# Altium PCB M3 ICE.PcbDoc (part 2 of 2)
Units mil, origin at the board's own origin, x right, y up, seen from the top; angles counter-clockwise.
Board outline 4160 x 4350 mil, 4 copper layers (Top Layer, Mid-Layer 1, Mid-Layer 2, Bottom Layer); 242 components, 240 nets, 954 pads, 145 vias.
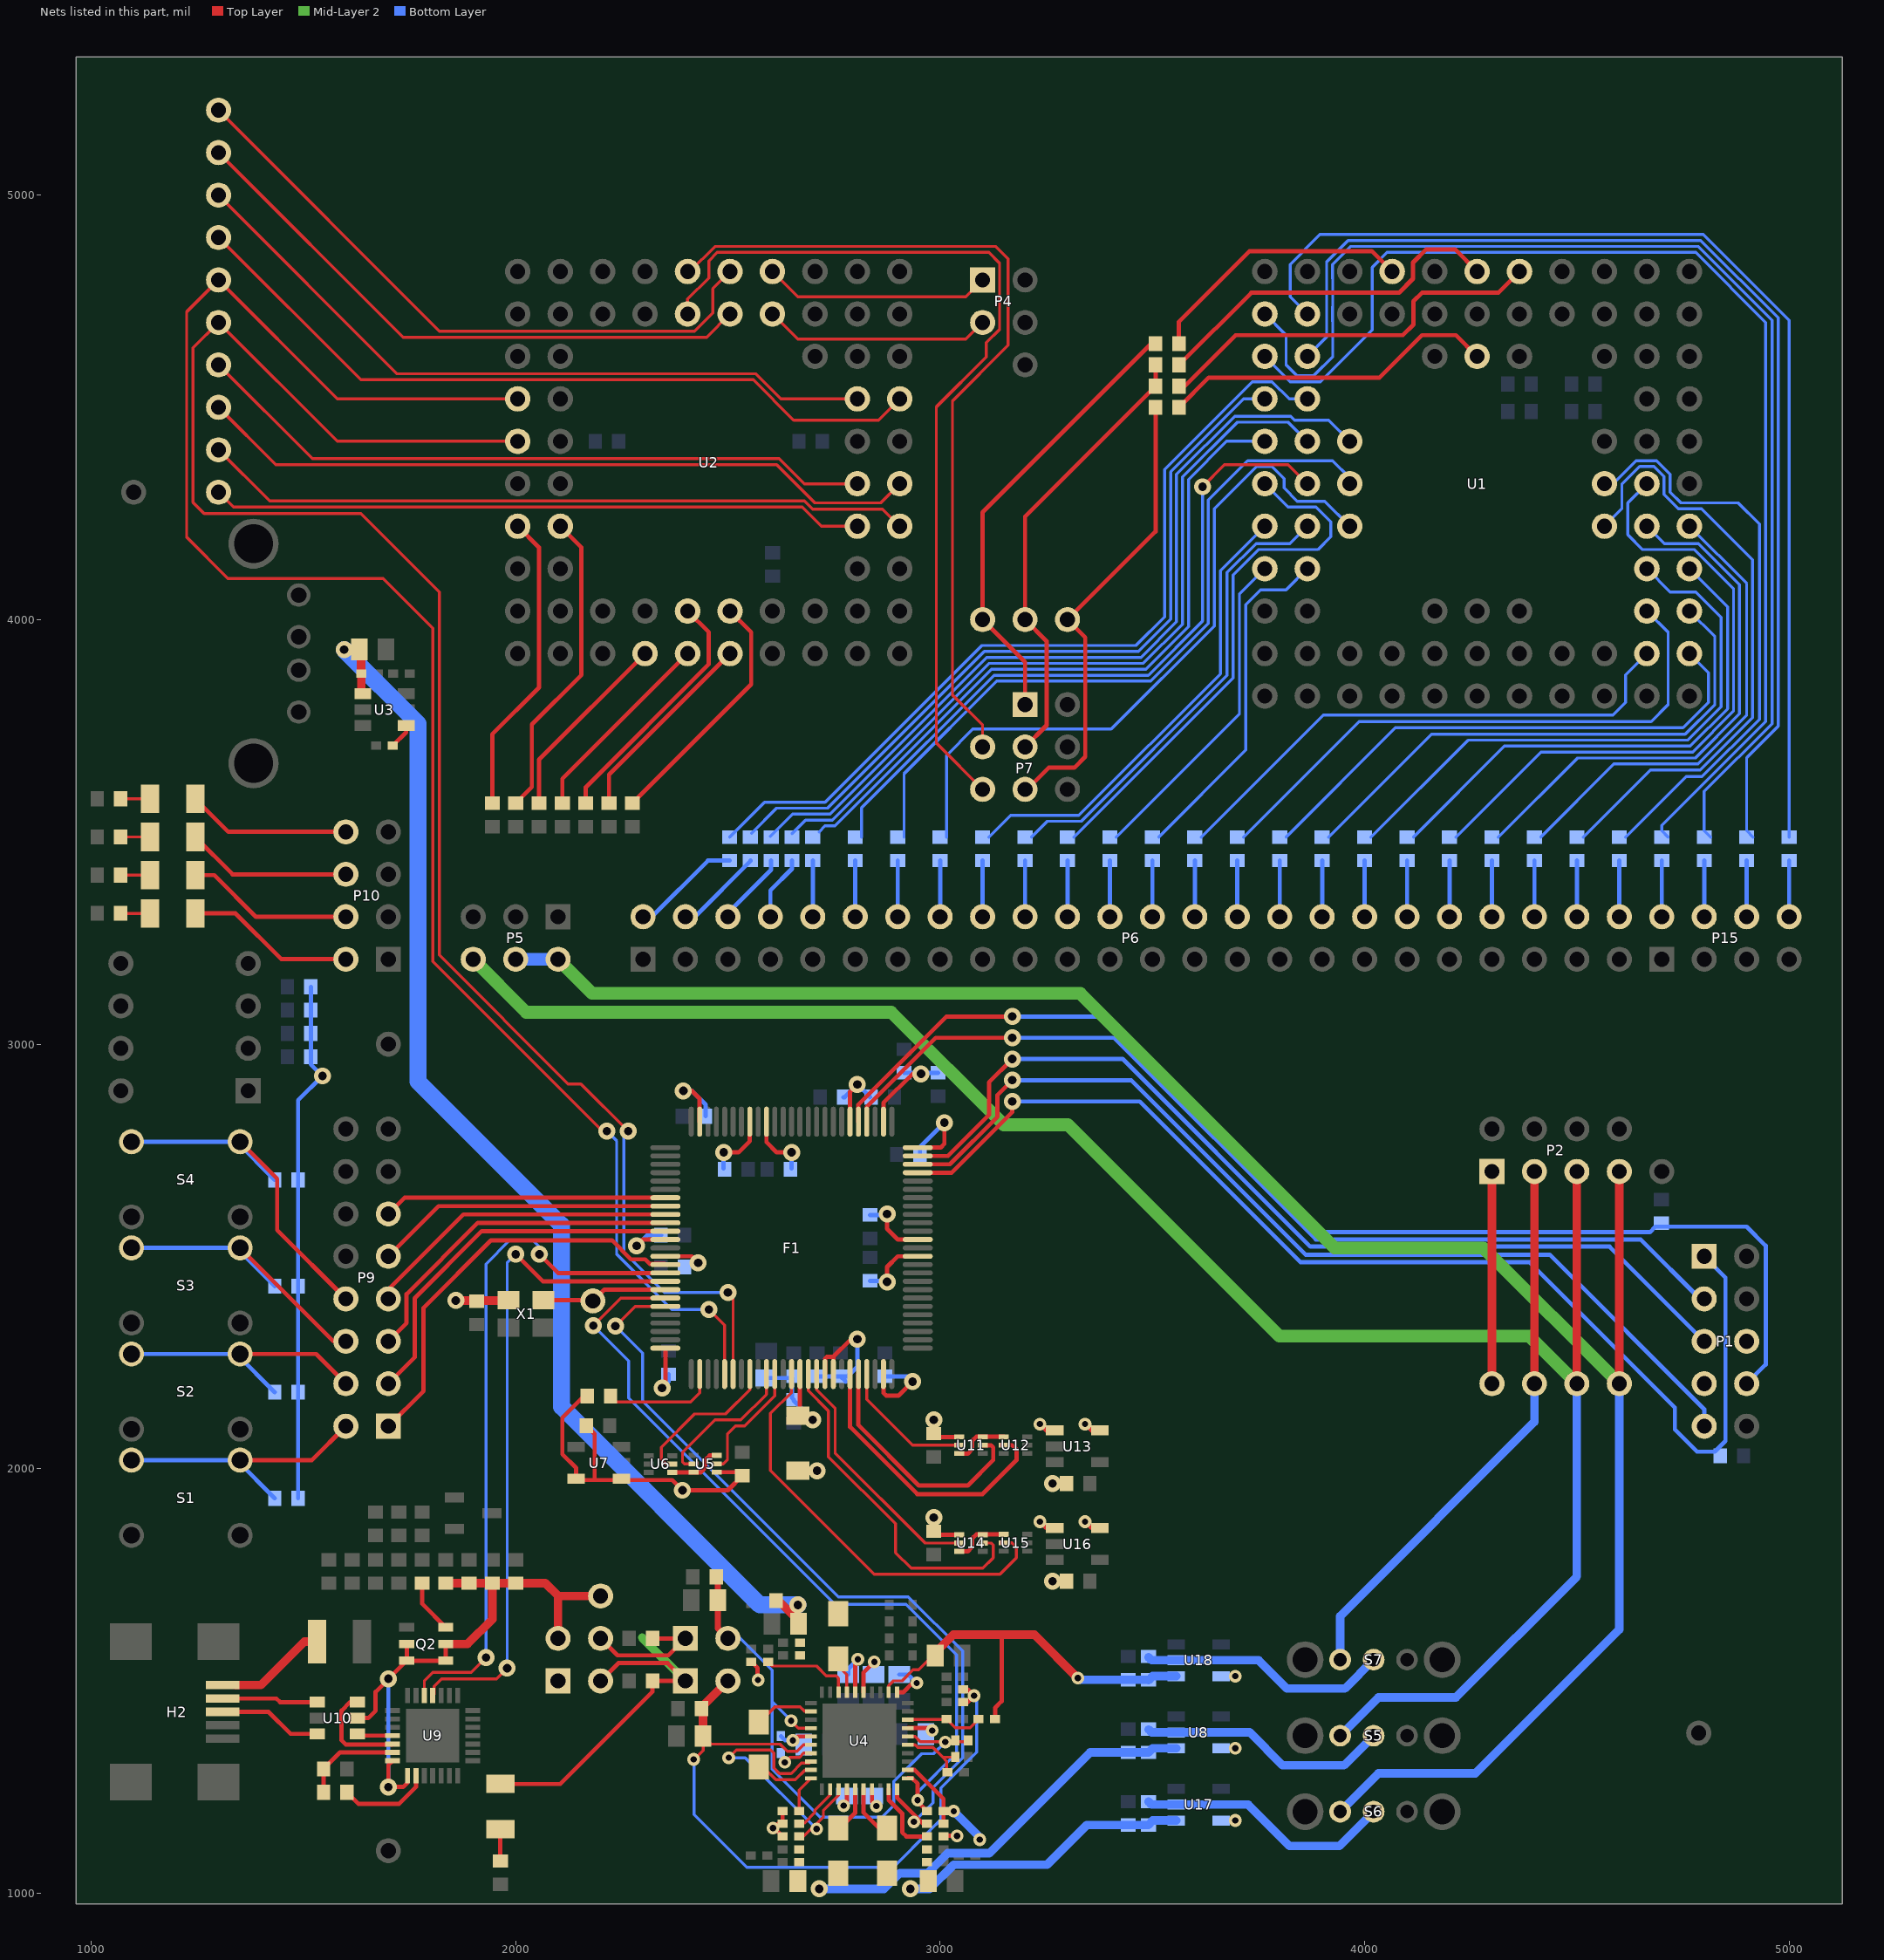
[diagram p4: the nets of this part, all layers, seen from the top]

## Via types
v1: diameter 40, hole 20, Top Layer to Bottom Layer, 95 vias
v2: diameter 30, hole 15, Top Layer to Bottom Layer, 40 vias
v3: diameter 30, hole 15, Top Layer to Bottom Layer, tented bottom, 6 vias
v4: diameter 200, hole 120, Top Layer to Bottom Layer, 4 vias

## Nets (pads, with @x,y where several pads share a name; then routed paths per layer and width w, separated by ;. In a path a pad name is that pad's centre, name@x,y a point inside that pad or via, vN(x,y) a via of type N, cw(c..) or ccw(c..) an arc to the next point about the centre after c; other vN are vias at no path point) (continued)
NetF1_82: F1.82 P9.11 | length 668.5
  Top Layer w10: P9.11@1700,2600 1738.11,2638.11 F1.82@2352.76,2638.11
NetF1_83: F1.83 P9.9 | length 701.8
  Top Layer w10: P9.9@1700,2500 1818.43,2618.43 F1.83@2352.76,2618.43
NetF1_84: F1.84 P9.7 | length 760.8
  Top Layer w10: P9.7@1684.5,2393.58 1684.5,2406.42 1876.82,2598.74 F1.84@2352.76,2598.74
NetF1_85: F1.85 P9.5 | length 808.2
  Top Layer w10: P9.5@1700,2300 1743,2343 1743,2411 1911.06,2579.06 F1.85@2352.76,2579.06
NetF1_86: F1.86 P9.3 | length 883
  Top Layer w10: P9.3@1700,2200 1762,2262 1762,2401 1920.37,2559.37 F1.86@2352.76,2559.37
NetF1_90: F1.90 P9.1 | length 972.8
  Top Layer w10: P9.1@1700,2100 1783,2183 1783,2379 1942,2538 2226.75,2538 2271.75,2493 2305.22,2493 2315.81,2482.41 2350.98,2482.41 F1.90@2352.76,2480.63
NetF2_1: F2.1 H2.1 | length 234.3
  Top Layer w20: H2.1@1340,1490 1400,1490 1502.56,1592.56 F2.1@1531.85,1592.56
NetH2_2: H2.2 U10.1 | length 196.3
  Top Layer w10: H2.2@1340,1458.5 1436.5,1458.5 1445.04,1449.96 U10.1@1532.76,1449.96
NetH2_3: H2.3 U10.3 | length 214.2
  Top Layer w10: H2.3@1340,1427.01 1417.99,1427.01 1469.84,1375.16 U10.3@1532.76,1375.16
NetI1_1: I1.1 U4.7 | length 70.1
  Top Layer w7: I1.1@2760,1535 2780.32,1514.68 U4.7@2780.32,1473.35
NetI2_1: I2.1 U4.25 | length 108.5
  Top Layer w10: I2.1@2760,1158.94 2769.94,1158.94 2800,1189 U4.25@2800,1245
NetI3_1: I3.1 U4.26 | length 116.8
  Top Layer w10: U4.26@2819.68,1245 2819.68,1189.32 2855.85,1153.15 I3.1@2865.79,1153.15
NetI4_1: I4.1 U4.12 | length 140
  Top Layer w7: I4.1@2575,1403.15 2610.85,1439 2670,1439 2680.93,1428.07 U4.12@2695.67,1428.07
NetI4_2: I4.2 U4.19 | length 131.9
  Top Layer w7: I4.2@2585,1295 2613,1267 2658.53,1267 2681.8,1290.28 U4.19@2695.67,1290.28
NetLED1_1: LED1.1 P10.2 | length 399.6
  Top Layer w10: LED1.1@1245.15,3308 1340,3308 1448,3200 P10.2@1600,3200
NetLED1_2: LED1.2 R5.2 | length 69.3
  Top Layer w7: R5.2@1069.56,3308 LED1.2@1138.85,3308
NetLED2_1: LED2.1 P10.4 | length 395.4
  Top Layer w10: LED2.1@1245.15,3398 1290,3398 1388,3300 P10.4@1600,3300
NetLED2_2: LED2.2 R6.2 | length 69.3
  Top Layer w7: R6.2@1069.56,3398 LED2.2@1138.85,3398
NetLED3_1: LED3.1 P10.6 | length 391.3
  Top Layer w10: LED3.1@1245.15,3488 1333.15,3400 P10.6@1600,3400
NetLED3_2: LED3.2 R7.2 | length 69.3
  Top Layer w7: R7.2@1069.56,3488 LED3.2@1138.85,3488
NetLED4_1: LED4.1 P10.8 | length 387.2
  Top Layer w10: LED4.1@1245.15,3578 1323.15,3500 P10.8@1600,3500
NetLED4_2: LED4.2 R8.2 | length 69.3
  Top Layer w7: R8.2@1069.56,3578 LED4.2@1138.85,3578
NetLED9_2: LED9.2 R98.2 | length 75.3
  Top Layer w10: R98.2@1964,1075.56 LED9.2@1964,1150.85
NetP4_1: P4.1 U2.D1 | length 536
  Top Layer w7: U2.D1@2605,4820 2664.5,4760.5 3060.5,4760.5 P4.1@3100,4800
NetP4_3: P4.3 U2.D2 | length 536
  Top Layer w7: U2.D2@2605,4720 2664.5,4660.5 3060.5,4660.5 P4.3@3100,4700
NetP6_2: P6.2 R17.2 | length 258.9
  Bottom Layer w10: P6.2@2300,3300 2320.56,3300 2453,3432.44 R17.2@2504,3432.44
NetP6_4: P6.4 R18.2 | length 186.7
  Bottom Layer w10: P6.4@2421.99,3300 2553,3431.01 R18.2@2553,3432.44
NetP6_6: P6.6 R19.2 | length 174.7
  Bottom Layer w10: P6.6@2500,3300 2500,3309 2602,3411 R19.2@2602,3432.44
NetP6_8: P6.8 R20.2 | length 153.6
  Bottom Layer w10: P6.8@2600,3300 2600,3362 2651,3413 R20.2@2651,3432.44
NetP6_10: P6.10 R21.2 | length 132.4
  Bottom Layer w10: P6.10@2700,3300 R21.2@2700,3432.44
NetP6_12: P6.12 R22.2 | length 132.4
  Bottom Layer w10: P6.12@2800,3300 R22.2@2800,3432.44
NetP6_14: P6.14 R23.2 | length 132.4
  Bottom Layer w10: P6.14@2900,3300 R23.2@2900,3432.44
NetP6_16: P6.16 R24.2 | length 132.4
  Bottom Layer w10: P6.16@3000,3300 R24.2@3000,3432.44
NetP6_18: P6.18 R25.2 | length 132.4
  Bottom Layer w10: P6.18@3100,3300 R25.2@3100,3432.44
NetP6_20: P6.20 R26.2 | length 132.4
  Bottom Layer w10: P6.20@3200,3300 R26.2@3200,3432.44
NetP6_22: P6.22 R27.2 | length 132.4
  Bottom Layer w10: P6.22@3300,3300 R27.2@3300,3432.44
NetP6_24: P6.24 R28.2 | length 132.4
  Bottom Layer w10: P6.24@3400,3300 R28.2@3400,3432.44
NetP6_26: P6.26 R29.2 | length 132.4
  Bottom Layer w10: P6.26@3500,3300 R29.2@3500,3432.44
NetP6_28: P6.28 R30.2 | length 132.4
  Bottom Layer w10: P6.28@3600,3300 R30.2@3600,3432.44
NetP6_30: P6.30 R31.2 | length 132.4
  Bottom Layer w10: P6.30@3700,3300 R31.2@3700,3432.44
NetP6_32: P6.32 R32.2 | length 132.4
  Bottom Layer w10: P6.32@3800,3300 R32.2@3800,3432.44
NetP6_34: P6.34 R33.2 | length 132.4
  Bottom Layer w10: P6.34@3900,3300 R33.2@3900,3432.44
NetP6_36: P6.36 R34.2 | length 132.4
  Bottom Layer w10: P6.36@4000,3300 R34.2@4000,3432.44
NetP6_38: P6.38 R35.2 | length 132.4
  Bottom Layer w10: P6.38@4100,3300 R35.2@4100,3432.44
NetP6_40: P6.40 R36.2 | length 132.4
  Bottom Layer w10: P6.40@4200,3300 R36.2@4200,3432.44
NetP6_42: P6.42 R37.2 | length 132.4
  Bottom Layer w10: P6.42@4300,3300 R37.2@4300,3432.44
NetP6_44: P6.44 R38.2 | length 132.4
  Bottom Layer w10: P6.44@4400,3300 R38.2@4400,3432.44
NetP6_46: P6.46 R39.2 | length 132.4
  Bottom Layer w10: P6.46@4500,3300 R39.2@4500,3432.44
NetP6_48: P6.48 R40.2 | length 132.4
  Bottom Layer w10: P6.48@4600,3300 R40.2@4600,3432.44
NetP7_1: P7.1 U2.F1 | length 2005.1
  Top Layer w7: U2.F1@2405,4820 2410.2,4820 2469.2,4879 3131,4879 3160,4850 3160,4816.61 ; P7.1@3100,3720 3100,3751.2 3029,3822.2 3029,4515 3159.97,4645.97 3159.97,4716.58 ; 3159.97,4783.42 3159.97,4816.58 ; 3160,4716.61 3160,4783.39
NetP7_2: P7.2 R41.2 R92.2 TP29.1 | length 1069.4
  Top Layer w10: P7.2@3200,3700 3251,3751 3251,3949 TP29.1@3200,4000 3200,4242.99 3507.01,4550 R41.2@3507.44,4550 ; R41.2@3507.44,4550.44 R92.2@3507.44,4600
NetP7_4: P7.4 U2.F2 | length 2199.8
  Top Layer w7: U2.F2@2405,4720 2405,4755 2455,4805 2455,4845 2475,4865 3115,4865 3140.03,4839.97 3140.03,4766.12 ; P7.4@3102.5,3597.5 2991,3709 2991,4501 3109,4619 3109,4652.25 3140.03,4683.27 3140.03,4716.58 ; 3140,4716.61 3140,4766.1
NetP7_5: P7.5 R42.2 TP30.1 | length 1066.9
  Top Layer w10: 3225,3620 3256,3651 3316,3651 3342,3677 3342,3958 TP30.1@3300,4000 3507.44,4207.44 R42.2@3507.44,4500
NetP9_2: P9.2 R65.2 S1.1 | length 657
  Top Layer w10: S1.1@1350.91,2020 1520,2020 P9.2@1600,2100
  Bottom Layer w10: S1.1@1095,2020 1342.44,2020 R65.2@1432.44,1930
NetP9_4: P9.4 R66.2 S2.1 | length 652.8
  Top Layer w10: S2.1@1350.91,2270 1530,2270 P9.4@1600,2200
  Bottom Layer w10: S2.1@1095,2270 1342.44,2270 R66.2@1432.44,2180
NetP9_6: P9.6 R67.2 S3.1 | length 714.9
  Top Layer w10: S3.1@1350.91,2520 1570.91,2300 P9.6@1600,2300
  Bottom Layer w10: S3.1@1095,2520 1342.44,2520 R67.2@1432.44,2430
NetP9_8: P9.8 R68.2 S4.1 | length 847.9
  Top Layer w10: S4.1@1350.91,2770 1438,2682.91 1438,2562 P9.8@1600,2400
  Bottom Layer w10: S4.1@1095,2770 1342.44,2770 R68.2@1432.44,2680
NetP12_1: P12.1 R99.2 TP25.1 | length 1066.3
  Top Layer w10: P12.1@3200,3800 3200,3900 TP25.1@3100,4000 3100,4253 3497,4650 R99.2@3507.44,4650
NetP15_2: P15.2 R73.2 | length 132.4
  Bottom Layer w10: P15.2@4700,3300 R73.2@4700,3432.44
NetP15_4: P15.4 R74.2 | length 132.4
  Bottom Layer w10: P15.4@4800,3300 R74.2@4800,3432.44
NetP15_6: P15.6 R75.2 | length 132.4
  Bottom Layer w10: P15.6@4900,3300 R75.2@4900,3432.44
NetP15_8: P15.8 R76.2 | length 132.4
  Bottom Layer w10: P15.8@5000,3300 R76.2@5000,3432.44
NetQ2_3: Q2.3 R59.2 | length 126.5
  Top Layer w10: R59.2@1780,1730 1780,1681.3 Q2.3@1835,1626.3
NetR1_1: R1.1 S5.2 U8.2 | length 594.3
  Bottom Layer w20: R1.1@3491,1385.56 3497.99,1378.57 U8.2@3556,1378.57 3729.43,1378.57 3807,1301 3951.26,1301 S5.2@4021.26,1371
NetR2_1: R2.1 S6.2 U17.2 | length 607.1
  Bottom Layer w20: R2.1@3491,1215.56 3497.99,1208.57 U17.2@3556,1208.57 3725.57,1208.57 3823.14,1111 3940.26,1111 S6.2@4021.26,1192
NetR3_1: R3.1 S7.2 U18.2 | length 588.9
  Bottom Layer w20: R3.1@3491,1555.56 3497.99,1548.57 U18.2@3556,1548.57 3750.43,1548.57 3817,1482 3953.26,1482 S7.2@4021.26,1550
NetR17_1: R17.1 U1.K4 | length 2025.6
  Bottom Layer w7: R17.1@2504,3487.56 2586.25,3569.81 2729.01,3569.81 3098.21,3939 3461.41,3939 3529,4006.59 3529,4353.8 3735.7,4560.5 3781.78,4560.5 3822.28,4520 U1.K4@3865,4520
NetR18_1: R18.1 U1.L4 | length 1836.1
  Bottom Layer w7: R18.1@2556,3497 2614.81,3555.81 2734.81,3555.81 3104.01,3925 3467.21,3925 3543,4000.79 3543,4348 3715,4520 U1.L4@3765,4520
NetR19_1: R19.1 U1.J5 | length 2002.4
  Bottom Layer w7: R19.1@2600.28,3489.28 2652.81,3541.81 2740.61,3541.81 3109.8,3911 3473.01,3911 3557,3994.99 3557,4342 3694,4479 3825.8,4479 3834.8,4470 3915,4470 U1.J5@3965,4420
NetR20_1: R20.1 U1.K5 | length 1837.2
  Bottom Layer w7: R20.1@2651,3496 2682.81,3527.81 2746.41,3527.81 3115.6,3897 3478.8,3897 3571,3989.2 3571,4336 3700,4465 3820,4465 U1.K5@3865,4420
NetR21_1: R21.1 U1.L5 | length 1634.1
  Bottom Layer w7: R21.1@2715,3500 2728.81,3513.81 2752.21,3513.81 3121.4,3883 3484.6,3883 3585,3983.4 3585,4330 3675,4420 U1.L5@3765,4420
NetR22_1: R22.1 U1.K6 | length 1658
  Top Layer w7: v1(3618,4313) 3670,4365 3820,4365 U1.K6@3865,4320
  Bottom Layer w7: R22.1@2815,3487.56 2815,3556.8 3127.2,3869 3490.4,3869 3618,3996.6 v1(3618,4313)
NetR23_1: R23.1 U1.J6 | length 1706.3
  Bottom Layer w7: R23.1@2915,3487.56 2915,3637 3133,3855 3496.2,3855 3632,3990.8 3632,4282 3724.5,4374.5 3924.5,4374.5 3965,4334 U1.J6@3965,4320
NetR24_1: R24.1 U1.J7 | length 1657.2
  Bottom Layer w7: R24.1@3015,3487.56 3015,3680 3077,3742 3403,3742 3646,3985 3646,4261 3745.5,4360.5 3781.78,4360.5 3810,4332.28 3810,4310 3841,4279 3906,4279 U1.J7@3965,4220
NetR25_1: R25.1 U1.L7 | length 1095.6
  Bottom Layer w7: R25.1@3115,3487.56 3166.44,3539 3326.84,3539 3660,3872.16 3660,4115 U1.L7@3765,4220
NetR26_1: R26.1 U1.K7 | length 1095.4
  Bottom Layer w7: R26.1@3215,3487.56 3252.44,3525 3332.64,3525 3676,3868.36 3676,4110.8 3744.2,4179 3824,4179 U1.K7@3865,4220
NetR27_1: R27.1 U1.L6 | length 1267.3
  Bottom Layer w7: R27.1@3315,3487.56 3690,3862.56 3690,4105 3750,4165 3890,4165 3920,4195 3920,4230 3885,4265 3820,4265 U1.L6@3765,4320
NetR28_1: R28.1 U1.L8 | length 777.4
  Bottom Layer w7: R28.1@3415,3487.56 3705,3777.56 3705,4060 U1.L8@3765,4120
NetR29_1: R29.1 U1.K8 | length 812.6
  Bottom Layer w7: R29.1@3515,3487.56 3720,3692.56 3720,4035 3755,4070 3815,4070 U1.K8@3865,4120
NetR30_1: R30.1 U1.B10 | length 1267.2
  Bottom Layer w7: R30.1@3615,3487.56 3902.44,3775 4585,3775 4615,3805 4615,3870 U1.B10@4665,3920
NetR31_1: R31.1 U1.B9 | length 1370.1
  Bottom Layer w7: R31.1@3715,3487.56 3987.44,3760 4675,3760 4715,3800 4715,3970 U1.B9@4665,4020
NetR32_1: R32.1 U1.A10 | length 1260.1
  Bottom Layer w7: R32.1@3815,3487.56 4072.44,3745 4750,3745 4810,3805 4810,3875 U1.A10@4765,3920
NetR33_1: R33.1 U1.A9 | length 1284.3
  Bottom Layer w7: R33.1@3915,3487.56 4157.44,3730 4755,3730 4825,3800 4825,3960 U1.A9@4765,4020
NetR34_1: R34.1 U1.B8 | length 1385
  Bottom Layer w7: R34.1@4015,3487.56 4243.44,3716 4761,3716 4840,3795 4840,4005 4780,4065 4720,4065 U1.B8@4665,4120
NetR35_1: R35.1 U1.A8 | length 1232.6
  Bottom Layer w7: R35.1@4115,3487.56 4329.44,3702 4767,3702 4855,3790 4855,4030 U1.A8@4765,4120
NetR36_1: R36.1 U1.B6 | length 1506.2
  Bottom Layer w7: R36.1@4215,3487.56 4415.44,3688 4773,3688 4869,3784 4869,4073.28 4777.28,4165 4655,4165 4620,4200 4620,4275 U1.B6@4665,4320
NetR37_1: R37.1 U1.B7 | length 1267.5
  Bottom Layer w7: R37.1@4315,3487.56 4501.44,3674 4779,3674 4883,3778 4883,4082 4786,4179 4706,4179 U1.B7@4665,4220
NetR38_1: R38.1 U1.A7 | length 1105
  Bottom Layer w7: R38.1@4415,3487.56 4587.44,3660 4785,3660 4900,3775 4900,4085 U1.A7@4765,4220
NetR39_1: R39.1 U1.C7 | length 1443.8
  Bottom Layer w7: R39.1@4515,3487.56 4673.44,3646 4790.8,3646 4914,3769.2 4914,4141 4794,4261 4739.2,4261 4705.5,4294.7 4705.5,4303.22 4705.5,4336.78 4681.78,4360.5 4648.22,4360.5 4643.96,4356.24 4606,4318.28 4606,4261 U1.C7@4565,4220
NetR40_1: R40.1 U1.C6 | length 1364.1
  Bottom Layer w7: U1.C6@4565,4320 4585,4320 4639.5,4374.5 4687.57,4374.5 4719.5,4342.57 4719.5,4300.5 4745,4275 4880,4275 4930,4225 4930,3765 4795,3630 4757.44,3630 R40.1@4615,3487.56
NetR41_1: R41.1 U1.E1 | length 946.5
  Top Layer w10: R41.1@3562.56,4550 3576,4550 3696,4670 4090,4670 4115,4695 4115,4750 4135,4770 4315,4770 U1.E1@4365,4820
NetR42_1: R42.1 U1.F3 | length 793.6
  Top Layer w10: R42.1@3562.56,4500 3562.99,4500 3632.99,4570 4035,4570 4135,4670 4215,4670 U1.F3@4265,4620
NetR51_2: R51.2 R53.1 U4.38 | length 183
  Top Layer w7: U4.38@2924.02,1408.39 2924.63,1409 R53.1@3015.32,1409 ; R53.1@3015.32,1410 3035.66,1389.66 3070.85,1389.66 R51.2@3090.31,1409.13
NetR54_2: R54.2 R55.1 U4.35 | length 163.4
  Top Layer w7: U4.35@2924.02,1349.33 2940.67,1349.33 2947,1343 2982.86,1343 3005.55,1320.32 ; R54.2@3015.31,1285 3015.31,1310.55 3005.55,1320.32 ; R55.1@3036,1320.32 3005.55,1320.32
NetR62_1: R62.1 U9.9 | length 216.9
  Top Layer w10: R62.1@1602.56,1237.56 1630.12,1210 1725,1210 1765.12,1250.12 U9.9@1765.12,1276.46
NetR73_1: R73.1 U1.L3 | length 2805.5
  Bottom Layer w7: U1.L3@3765,4620 3824.5,4560.5 3895.5,4560.5 4017.5,4682.5 4017.5,4829.78 4052.72,4865 4780,4865 4945,4700 4945,3760 4700,3515 4700,3502.56 R73.1@4715,3487.56
NetR74_1: R74.1 U1.L2 | length 2912.1
  Bottom Layer w7: U1.L2@3765,4720 3815,4670 3815,4600 3840,4575 3880,4575 3925,4620 3925,4702.72 3924.5,4703.22 3924.5,4736.78 3925,4737.28 3925,4802.72 3924.5,4803.22 3924.5,4836.78 3966.72,4879 4786,4879 4960,4705 4960,3755 4800,3595 4800,3502.56 R74.1@4815,3487.56
NetR75_1: R75.1 U1.K3 | length 2661.4
  Bottom Layer w7: U1.K3@3865,4620 3910.5,4665.5 3910.5,4842.57 3960.93,4893 4791.8,4893 4974,4710.8 4974,3749 4900,3675 4900,3502.56 R75.1@4915,3487.56
NetR76_1: R76.1 U1.K2 | length 2639.3
  Bottom Layer w7: U1.K2@3865,4720 3824.5,4760.5 3824.5,4836.78 3894.72,4907 4798,4907 5000,4705 R76.1@5000,3487.56
NetR79_2: R79.2 U2.E9 | length 589.1
  Top Layer w10: R79.2@2275,3567.56 2555,3847.56 2555,3970 U2.E9@2505,4020
NetR80_2: R80.2 U2.E10 | length 470.5
  Top Layer w10: R80.2@2220,3567.56 2220,3635 U2.E10@2505,3920
NetR81_2: R81.2 U2.F9 | length 593.3
  Top Layer w10: R81.2@2165,3567.56 2165,3605 2455,3895 2455,3970 U2.F9@2405,4020
NetR82_2: R82.2 U2.F10 | length 474.6
  Top Layer w10: R82.2@2110,3567.56 2110,3625 U2.F10@2405,3920
NetR83_2: R83.2 U2.G10 | length 456
  Top Layer w10: R83.2@2055,3567.56 2055,3670 U2.G10@2305,3920
NetR84_2: R84.2 U2.J7 | length 737.4
  Top Layer w10: R84.2@2000,3567.56 2038,3605.56 2038,3753 2155,3870 2155,4170 U2.J7@2105,4220
NetR85_2: R85.2 U2.K7 | length 718.7
  Top Layer w10: R85.2@1945,3567.56 1945,3730 2055,3840 2055,4170 U2.K7@2005,4220
NetR88_1: R88.1 U4.22 | length 105.2
  Top Layer w7: 2680,1165 2705,1190 2705,1195 2740.94,1230.94 U4.22@2740.94,1245
NetR89_1: R89.1 U4.29 | length 168.6
  Top Layer w10: U4.29@2878.74,1245 2878.74,1219.53 2910.62,1187.65 2910.62,1143.19 2920.47,1133.35 R89.1@2960.12,1133.35
NetR90_1: R90.1 U4.17 | length 68.8
  Top Layer w7: v2@2635,1310 2645,1320 2668.86,1320 2678.51,1329.65 U4.17@2695.67,1329.65
  other v2: 2634,1308
NetR91_1: R91.1 U4.8 | length 214.9
  Top Layer w7: R91.1@2594.68,1545 2604.68,1535 2708.85,1535 2732.03,1511.82 2755,1511.82 2760.63,1506.19 U4.8@2760.63,1473.35
NetR92_1: R92.1 U1.F1 | length 858.9
  Top Layer w10: R92.1@3562.56,4600 3562.99,4600 3732.99,4770 4081,4770 4114,4803 4114,4841 4145,4872 4213,4872 U1.F1@4265,4820
NetR93_2: R93.2 U4.20 | length 88.7
  Top Layer w7: R93.2@2668.11,1193.35 2668.11,1243.03 U4.20@2695.67,1270.59
NetR94_1: R94.1 U3.1 | length 60.6
  Top Layer w10: R94.1@1710.68,3703 1742.18,3734.5 U3.1@1742.18,3750.6
NetR99_1: R99.1 U1.H1 | length 642.8
  Top Layer w10: R99.1@3562.56,4650 3562.56,4701.56 3729,4868 4017,4868 U1.H1@4065,4820
NetTP2_1: TP2.1 U2.B4 | length 1718.8
  Top Layer w7: TP2.1@1285,5000 TP2.1@1300,5000 1721,4579 2566,4579 2625,4520 U2.B4@2805,4520
NetTP3_1: TP3.1 U2.A6 | length 1716.8
  Top Layer w7: TP3.1@1300,4500 1435,4365 2615,4365 2705,4275 2860,4275 U2.A6@2905,4320
NetTP4_1: TP4.1 U2.E1 | length 1527.3
  Top Layer w7: TP4.1@1285,5200 TP4.1@1300,5200 1820.5,4679.5 2421.78,4679.5 2464.5,4722.22 2464.5,4779.5 U2.E1@2505,4820
NetTP6_1: TP6.1 U2.A4 | length 1803.8
  Top Layer w7: TP6.1@1300,4900 1635,4565 2560,4565 2655,4470 2855,4470 U2.A4@2905,4520
NetTP7_1: TP7.1 U2.B6 | length 1621
  Top Layer w7: TP7.1@1300,4600 1521,4379 2621,4379 2680,4320 U2.B6@2805,4320
NetTP8_1: TP8.1 U2.E2 | length 1423
  Top Layer w7: TP8.1@1285,5100 TP8.1@1300,5100 1735,4665 2450,4665 U2.E2@2505,4720
NetTP10_1: TP10.1 U2.B7 | length 1538.1
  Top Layer w7: TP10.1@1300,4300 1335,4265 2675,4265 2720,4220 U2.B7@2805,4220
NetTP11_1: TP11.1 U2.A7 | length 1680
  Top Layer w7: TP11.1@1300,4400 1420.5,4279.5 2121.78,4279.5 2122.28,4280 2680,4280 2699.5,4260.5 2864.5,4260.5 U2.A7@2905,4220
NetU5_3: U5.3 U5.6 U6.1 | length 132.8
  Top Layer w10: U6.1@2369,1991 2436,1991 2447,2002 2447,2021 2457,2031 U5.6@2474.12,2031
NetU9_4: U9.4 U10.4 | length 84.5
  Top Layer w10: U10.4@1627.24,1375.16 1631.46,1370.94 U9.4@1710,1370.94
NetU9_5: U9.5 U10.6 | length 239.9
  Top Layer w10: U10.6@1627.24,1449.96 1609.96,1449.96 1590,1430 1590,1360 1599.64,1350.36 1709.1,1350.36 U9.5@1710,1351.26
NetU11_3: U11.3 U11.6 U12.1 | length 133.4
  Top Layer w10: U11.6@3044.88,2035 3065,2035 3075,2045 3075,2065 3085,2075 U12.1@3150,2075
NetU14_3: U14.3 U14.6 U15.1 | length 133.4
  Top Layer w10: U14.6@3044.88,1805 3065,1805 3075,1815 3075,1835 3085,1845 U15.1@3150,1845
PMU_SCL: F1.95 R58.1 U4.30 | length 1895.2
  Top Layer w7: v1(2235,2336) 2281.2,2382.2 F1.95@2352.76,2382.2
  Top Layer w10: U4.30@2898.43,1245 2898.43,1225.04 R58.1@2960.12,1163.35
  Bottom Layer w7: v1(2235,2336) 2299,2272 2299,2159 2760,1698 2925,1698 3053,1570 3053,1319 2983,1249 2983,1213 v2(2938,1168)
PMU_SDA: F1.94 R86.1 U4.31 | length 1907.6
  Top Layer w7: v1(2183,2337) 2247.89,2401.89 F1.94@2352.76,2401.89
  Top Layer w10: U4.31@2924.02,1270.59 2934.41,1270.59 2947,1258 v2(2947,1219) 2947,1215.09 R86.1@2968.74,1193.35
  Bottom Layer w7: v1(2183,2337) 2266,2254 2266,2166 2752,1680 2920,1680 3039,1561 3039,1330 2947,1238 v2(2947,1219)
POR: F1.2 R9.1 | length 268.9
  Top Layer w7: R9.1@2223.56,2171 2237.56,2157 2412,2157 2433.46,2178.46 F1.2@2433.46,2222.76
SCL_DIG: F1.5 TP5.1 U2.K4 | length 4225.5
  Top Layer w7: U2.K4@2005,4520 1580,4520 TP5.1@1300,4800 1225,4725 1225,4194 1322,4097 1688,4097 1805,3980 1805,3195 2205,2795 v1(2215,2795) ; v1(2455,2375) 2492.52,2337.48 F1.5@2492.52,2222.76
  Bottom Layer w7: v1(2215,2795) 2238,2772 2238,2505 2368,2375 v1(2455,2375)
SCL_PD: F1.21 U11.2 | length 578.8
  Top Layer w10: F1.21@2807.48,2222.76 2807.48,2102.52 2950,1960 3065,1960 3125,2020 3125,2050 3120,2055 3100.31,2055 U11.2@3100,2055.31
SCL_PU: F1.22 U11.5 | length 322.2
  Top Layer w7: F1.22@2827.17,2222.76 2827.17,2162.83 2934.69,2055.31 U11.5@3044.88,2055.31
SCL_TRI: F1.20 U12.2 | length 674.7
  Top Layer w10: F1.20@2787.8,2222.76 2787.8,2098.16 2945.96,1940 3100,1940 3180,2020 3180,2045 3169.68,2055.32 U12.2@3150,2055.32
SDA_DIG: F1.6 TP9.1 U2.K5 | length 4180.3
  Top Layer w7: U2.K5@2005,4420 1580,4420 TP9.1@1300,4700 1240,4640 1240,4276 1266,4250 1635,4250 1820,4065 1820,3210 2123.75,2906.25 2153.75,2906.25 v1(2265,2795) ; v1(2500,2415) 2512.2,2402.8 F1.6@2512.2,2222.76
  Bottom Layer w7: v1(2265,2795) 2254.5,2784.5 2254.5,2510.5 2350,2415 v1(2500,2415)
SDA_PD: F1.15 U14.2 | length 817.5
  Top Layer w7: F1.15@2689.37,2222.76 2689.37,2183.71 2737.11,2135.97 2737.11,2027.89 2895,1870 2895,1802 2931.5,1765.5 3100.5,1765.5 3124.69,1789.68 3124.69,1819.68 3119.69,1824.68 U14.2@3100,1824.68
SDA_PU: F1.16 U14.5 | length 584.2
  Top Layer w7: F1.16@2709.06,2222.76 2709.06,2185.94 2752.61,2142.39 2752.61,2036.63 2964.56,1824.68 U14.5@3044.88,1824.68
SDA_TRI: F1.13 U15.2 | length 1004
  Top Layer w7: F1.13@2650,2222.76 2650,2180 2600,2130 2600,1995.94 2844.94,1751 3141,1751 3179.69,1789.68 3179.69,1814.68 3169.37,1825 U15.2@3149.69,1825
SPARE_PD: F1.10 U5.2 | length 352.4
  Top Layer w7: U5.2@2419,2011.32 2397.68,2011.32 2393,2016 2393,2038 2469.5,2114.5 2530.5,2114.5 2590.94,2174.94 F1.10@2590.94,2222.76
SPARE_PU: F1.11 U5.5 | length 274.2
  Top Layer w7: U5.5@2474.12,2011.32 2489.12,2011.32 2499,2021.19 2499,2082 2517.5,2100.5 2539.5,2100.5 2610.63,2171.63 F1.11@2610.63,2207.26
SPARE_TRI: F1.8 U6.2 | length 360.5
  Top Layer w7: U6.2@2369,2010.68 2354.32,2010.68 2343,2022 2343,2050 2421.75,2128.75 2494.55,2128.75 2551.57,2185.78 F1.8@2551.57,2222.76
SYS_CLK: F1.93 TP1.1 X1.3 | length 296.1
  Top Layer w10: X1.3@2065.68,2396.96 TP1.1@2180.04,2396.96 ; TP1.1@2182,2395 2208.57,2421.57 F1.93@2352.76,2421.57
TCK: F1.47 P1.1 R10.1 | length 2825.2
  Top Layer w10: F1.47@2947.24,2697.17 3027.17,2697.17 3170,2840 v1(3170,2865)
  Bottom Layer w10: v1(3170,2865) 3470,2865 3849,2486 4389,2486 4731,2144 4731,2092 4783,2040 4825,2040 4850,2065 4850,2450 P1.1@4800,2500
TDI: F1.48 P1.9 | length 2325.7
  Top Layer w10: F1.48@2947.24,2716.85 3022.81,2716.85 3135,2829.04 3135,2880 v1(3170,2915)
  Bottom Layer w10: v1(3170,2915) 3450,2915 3861,2504 4436,2504 4800,2140 P1.9@4800,2100
TDO: F1.54 P1.3 | length 2320.1
  Top Layer w10: F1.54@2827.17,2817.24 2827.17,2852.41 2989.76,3015 v1(3170,3015)
  Bottom Layer w10: v1(3170,3015) 3410,3015 3885,2540 4650,2540 P1.3@4790,2400
TMS: F1.49 P1.5 | length 2267.9
  Top Layer w10: F1.49@2947.24,2736.54 3018.45,2736.54 3115,2833.08 3115,2910 v1(3170,2965)
  Bottom Layer w10: v1(3170,2965) 3430,2965 3872,2523 4577,2523 P1.5@4800,2300
TRST: F1.55 P1.8 R11.1 | length 2841.8
  Top Layer w10: F1.55@2807.48,2817.24 2807.48,2857.48 3015,3065 v1(3170,3065)
  Bottom Layer w10: v1(3170,3065) 3390,3065 3898,2557 4672,2557 4685,2570 4900,2570 4945,2525 4945,2245 P1.8@4900,2200
USB_UART_RXD: F1.92 U9.25 | length 1590.7
  Top Layer w7: U9.25@1804.49,1465.43 1807.77,1468.71 1807.77,1487.5 1825.27,1505 1955,1505 v1(1980,1530)
  Top Layer w10: v1(2000,2505) 2063.74,2441.26 F1.92@2352.76,2441.26
  Bottom Layer w7: v1(1980,1530) 1980,2485 v1(2000,2505) v1@2015,2505
USB_UART_TXD: F1.91 U9.26 | length 1623.5
  Top Layer w7: U9.26@1784.8,1465.43 1784.8,1499.8 1805,1520 1895,1520 v1(1930,1555)
  Top Layer w10: v1(2056,2505) 2100.06,2460.94 F1.91@2352.76,2460.94
  Bottom Layer w7: v1(1930,1555) 1930,2482 1985,2537 2041,2537 v1@2073,2505
VCC_1P2: C3.2 C4.2 C5.2 C6.2 C9.2 C10.2 C11.2 C12.2 C13.2 C14.2 C26.2 C31.2 C54.2 C55.2 C56.2 C57.2 C64.2 F1.17 F1.18 F1.24 F1.37 F1.39 F1.50 F1.66 F1.68 F1.74 F1.89 FB1.1 P16.1 R9.2 TP18.1 U5.4 U7.1 U7.5 U11.4 U13.1 U13.5 U14.4 U16.1 U16.5 | length 3102.1
  Top Layer w10: U7.5@2142.7,1976 2142.7,2001.35 2110.03,2034.02 2110.03,2119.95 R9.2@2161.08,2171 ; U7.5@2145.61,1973.09 2186,1973.09 ; C64.2@2166.44,2101 2186,2081.44 2186,1973.09 ; TP18.1@2200,1600 2240,1560 2360,1560 P16.1@2400,1600 C26.2@2322.56,1600 ; F1.89@2352.76,2500.32 2414.68,2500.32 v1(2430,2485) ; v1(2395,2890) 2415,2890 2433.46,2871.54 F1.74@2433.46,2817.24 ; U5.4@2474.12,1991.63 C31.2@2525.5,1991.63 ; v1(2490,2745) 2525,2745 2551.57,2771.57 F1.68@2551.57,2817.24 ; C31.2@2534,1983.13 2499.87,1949 v1(2393,1949) 2368.91,1973.09 2186,1973.09 ; F1.66@2590.94,2817.24 2590.94,2769.06 2615,2745 v1(2650,2745) ; FB1.1@2665,1985 FB1.1@2665,1995 ; F1.17@2728.74,2222.76 2728.74,2258.74 2733.43,2263.43 2748.43,2263.43 ; F1.18@2748.43,2222.76 2748.43,2263.43 ; v1(2805,2305) 2790,2305 2748.43,2263.43 ; F1.24@2866.54,2222.76 2866.54,2178.46 2873,2172 2902,2172 v1(2935,2205) ; v1(2875,2440) 2875,2475 2900.32,2500.32 F1.37@2947.24,2500.32 ; v1(2875,2600) 2875,2565 2900.32,2539.68 F1.39@2947.24,2539.68 ; F1.50@2947.24,2756.22 3001.22,2756.22 3010,2765 v1(3010,2815) ; C56.2@2985,1852.56 2993.19,1844.37 U14.4@3044.88,1844.37 ; C54.2@2993.19,2074.37 U11.4@3044.88,2074.37 ; v3(3235,1875) 3250,1860 U16.1@3270,1860 ; v3(3235,2105) 3250,2090 U13.1@3270,2090 ; v3(3341.3,1875) 3356.3,1860 U16.5@3376.3,1860 ; v3(3341.3,2105) 3356.3,2090 U13.5@3376.3,2090
  Bottom Layer w10: v1(2395,2890) 2415,2890 2447.56,2857.44 C10.2@2447.56,2830 ; C5.2@2490,2707.44 v1(2490,2745) ; C9.2@2650,2707.44 v1(2650,2745) ; C3.2@2710,2217.44 C13.2@2765,2217.44 ; C13.2@2777.44,2205 C13.2@2765,2217.44 ; v1(2805,2305) 2805,2240 2782.44,2217.44 C13.2@2765,2217.44 ; C4.2@2835,2442.44 v1@2872.56,2442.44 ; C11.2@2835,2597.56 v1@2872.56,2597.56 ; C14.2@2870,2217.44 2922.56,2217.44 v1(2935,2205) ; C12.2@2952.56,2740 2952.56,2757.56 v1(3010,2815)
  other v1: 3265,1735 2985,1885 3265,1965 2710,1995 2985,2115
VCC_2102: C50.2 R62.2 U9.6 | length 233.7
  Top Layer w10: R62.2@1547.44,1237.56 C50.2@1547.44,1292.56 1586.46,1331.57 U9.6@1710,1331.57
VCC_B0: C1.2 C7.2 C8.2 C17.2 C18.2 C19.2 C20.2 C34.2 F1.52 F1.56 F1.87 F1.100 LED9.1 P1.6 P1.7 P11.1 R58.2 R65.1 R66.1 R67.1 R68.1 R69.1 R70.1 R71.1 R72.1 R86.2 TP17.1 U4.32 X1.4 | length 3246.7
  Top Layer w10: LED9.1@1964,1257.15 2105.15,1257.15 2322.56,1474.56 C34.2@2322.56,1500 P11.1@2400,1500 2358,1542 2242,1542 TP17.1@2200,1500 ; v1(2285,2525) 2299.68,2539.68 F1.87@2352.76,2539.68 ; v1(2345,2190) 2352.76,2197.76 F1.100@2352.76,2283.78 ; F1.56@2787.8,2817.24 2787.8,2887.8 v1(2805,2905) ; F1.52@2866.54,2817.24 2866.54,2861.54 2935,2930 v1(2955,2930) ; U4.32@2924.02,1290.28 2940,1290.28 3008.11,1222.17 R58.2@3008.11,1163.35
  Top Layer w20: v1(1859,2396) X1.4@1982.04,2396
  Mid-Layer 2 w20: 2298,1602 P11.1@2400,1500
  Bottom Layer w10: R65.1@1487.56,1930 R66.1@1487.56,2180 R67.1@1487.56,2430 R68.1@1487.56,2680 1487.56,2867.56 v1(1545,2925) 1517.56,2952.44 R69.1@1517.56,2970 R70.1@1517.56,3025 R71.1@1517.56,3080 R72.1@1517.56,3135 ; v1(2285,2525) 2310,2550 C7.2@2342.44,2550 ; v1(2345,2190) 2360,2205 C8.2@2360,2222.44 ; C20.2@2772.56,2875 2775,2875 v1(2805,2905) C18.2@2835,2875 ; C19.2@2915,2932.44 v1@2952.56,2932.44 ; v1@2957.56,2932.56 C17.2@2995,2932.56
  Bottom Layer w20: v2(3032,1193) v2@3093,1132
  other v2: 3093,1126
VCC_GOC: C25.2 C27.2 C61.1 I1.2 R12.1 R14.2 R15.1 U3.4 | length 2927.3
  Top Layer w20: C61.1@1631.5,3930 1636,3925.5 1636,3873.32 R12.1@1636.32,3873 U3.4@1636.32,3828.91 ; R14.2@2607.56,1689 2618.82,1689 C27.2@2666.5,1641.33
  Bottom Layer w40: v1(1596,3929) 1770,3755 1770,2912 2108,2574 2108,2146 2575,1679 v1(2665,1679)
VCC_M3_0P6: P2.3 S7.3 TP21.1 | length 1339.5
  Top Layer w20: TP21.1@4400,2200 P2.3@4400,2700
  Bottom Layer w20: S7.3@3942.52,1550 3942.52,1652.52 4400,2110 TP21.1@4400,2200
VCC_M3_1P2: P2.5 P5.6 S5.3 TP16.1 | length 4681
  Top Layer w20: TP16.1@4500,2200 P2.5@4500,2700
  Mid-Layer 2 w30: P5.6@1900,3200 2025,3075 2885,3075 3150,2810 3301,2810 3799,2312 4388,2312 TP16.1@4500,2200
  Bottom Layer w20: S5.3@3942.52,1371 4032.52,1461 4215,1461 4500,1746 TP16.1@4500,2200
VCC_M3_VBATT: P2.7 P5.2 P5.4 S6.3 TP14.1 | length 4942.5
  Top Layer w20: TP14.1@4600,2200 P2.7@4600,2700
  Mid-Layer 2 w30: P5.2@2100,3200 2180,3120 3330,3120 3930,2520 4280,2520 TP14.1@4600,2200
  Bottom Layer w20: S6.3@3942.52,1192 4032.52,1282 4261,1282 4600,1621 TP14.1@4600,2200
  Bottom Layer w30: P5.4@2000,3190 P5.4@2010,3200 ; P5.4@2000,3200 P5.4@2010,3200 ; P5.2@2100,3200 P5.4@2010,3200
VCC_PLF: C2.2 C15.2 C16.2 F1.14 FB1.2 | length 267.4
  Top Layer w10: FB1.2@2669.68,2129.61 F1.14@2669.68,2222.76
  Bottom Layer w10: C2.2@2590,2213.5 2651.06,2213.5 C15.2@2651.06,2166.5 ; C15.2@2655,2162.56 2655,2160 v1(2700,2115)
VCC_PRE: C30.1 C33.1 C37.1 C39.1 C40.1 C42.1 C43.1 P8.1 R87.2 R88.2 R89.2 R90.2 R91.2 R93.1 U4.1 U4.5 U4.6 U4.15 U4.24 U4.27 U4.37 U8.5 U17.5 U18.5 | length 676.8
  Top Layer w10: R91.2@2555.31,1545 2570,1530.31 v2@2570,1505 ; R87.2@2628.74,1133.35 2612.09,1150 2605,1150 2618.35,1163.35 R88.2@2628.74,1163.35 R93.1@2628.74,1193.35 ; v2@2655,1360 2664.02,1369.02 U4.15@2695.67,1369.02 ; v2@2775,1210 2780.31,1215.31 U4.24@2780.31,1245 ; U4.6@2800,1473.35 v2@2800,1540 ; U4.5@2819.68,1473.35 2819.68,1519.68 v2(2845,1545) ; U4.27@2839.37,1245 2839.37,1215.63 v2(2850,1205) ; U4.1@2898.43,1473.35 2913.35,1473.35 2935,1495 v2(2945,1495) ; U4.37@2924.02,1388.7 v2@2976.3,1388.7 ; R89.2@3009.76,1135 v2(3040,1135)
  Bottom Layer w10: R90.2@2625,1369.69 2634.69,1360 v2@2655,1360 ; C33.1@2783.43,1514.84 2783.43,1528.43 v2@2805,1550 ; C42.1@2903.43,1514.84 2925.16,1514.84 v2(2945,1495)
  other v2: 2606,1153 3695,1171.2 2773,1206 3695,1341.2 2653,1360 2981,1383 2571,1502 3695,1511.2 2806,1551
VCC_SOL: P2.1 TP27.1 | length 500
  Top Layer w20: TP27.1@4300,2200 P2.1@4300,2700
VCC_USB: C46.2 C47.2 C53.2 P8.2 Q2.1 Q2.2 Q2.5 Q2.6 R60.2 TP19.1 U9.7 U9.8 U10.5 | length 1435.5
  Top Layer w10: U10.5@1627.24,1412.56 1652.56,1412.56 1670,1430 1670,1474.09 Q2.6@1743.46,1547.56 ; U9.7@1710,1311.89 1700,1301.89 v1(1700,1250) 1735,1250 U9.8@1745.43,1260.43 ; Q2.5@1743.46,1586.93 Q2.6@1743.46,1547.56 ; Q2.2@1835,1586.93 Q2.1@1835,1547.56 Q2.6@1743.46,1547.56
  Top Layer w20: Q2.2@1835,1586.93 1886.93,1586.93 1945,1645 C46.2@1945,1730 ; R60.2@1835,1730 C47.2@1890,1730 C46.2@1945,1730 ; P8.2@2100,1600 2100,1700 ; TP19.1@2200,1700 2100,1700 ; C46.2@1945,1730 C53.2@2000,1730 2070,1730 2100,1700
  Bottom Layer w10: v1(1700,1250) v1(1700,1505)
VCCP_ICE_1P2: C45.1 C65.1 P16.2 R4.1 R55.2 U4.14 U4.36 | length 1344.3
  Top Layer w7: v2(2649,1406) 2666.3,1388.7 U4.14@2695.67,1388.7 ; U4.36@2924.02,1369.02 2940.98,1369.02 2953,1357 C45.1@3066,1357
  Top Layer w15: R4.1@2476.5,1741.06 C65.1@2476.5,1690 2476.5,1623.5 P16.2@2500,1600
  Bottom Layer w7: P16.2@2500,1600 2529,1600 2604,1525 2604,1451 ; v2(2649,1406) 2604,1451 ; v2(3012,1356) 2984.5,1328.5 2956.44,1328.5 2891,1263.06 2891,1207 2863,1179 2717,1179 2604,1292 2604,1451
VCCP_ICE_SYS: C35.2 C44.2 P11.2 R45.2 R49.1 U4.16 | length 1698.1
  Top Layer w7: v2@2420,1315 2441.5,1336.5 C35.2@2441.5,1370 ; C35.2@2449.65,1361.85 2460.5,1351 2623,1351 2640,1334 2663.06,1334 2678.39,1349.33 U4.16@2695.67,1349.33
  Top Layer w10: C44.2@3054.69,1450 3065,1450 v2(3080,1465) 3065,1480 R49.1@3054.68,1480
  Top Layer w20: C35.2@2441.5,1370 2441.5,1441.5 P11.2@2500,1500
  Bottom Layer w7: v2@2420,1315 2410,1315 2420,1305 2420,1185.2 2544.2,1061 2889.86,1061 2977.5,1148.64 2977.5,1148.76 3002,1173.26 3002,1248.06 3044.44,1290.5 3044.5,1290.5 3086,1332 3086,1459 v2(3080,1465)
  other v2: 2419,1315
VCCP_M3_0P6: C38.2 R3.2 R51.1 R52.2 U4.2 U18.1 | length 991
  Top Layer w7: U4.2@2878.74,1473.35 2878.74,1488.74 2890,1500 2910,1500 2936,1526 2949.5,1526 C38.2@2983.5,1560
  Top Layer w10: R51.1@3129.68,1410 3129.68,1436.68 3145,1452 3145,1605.31
  Top Layer w20: C38.2@2988.5,1560 2988.5,1566.33 3031.18,1609 3222,1609 v2(3324.28,1506.72)
  Bottom Layer w20: v2(3324.28,1506.72) 3328.56,1502.44 R52.2@3443,1502.44 R3.2@3491,1502.44 ; R3.2@3491,1501.44 3500.73,1511.17 U18.1@3556,1511.17
VCCP_M3_1P2: C29.2 C36.2 I2.2 R1.2 R13.2 R44.1 U8.1 | length 978.2
  Bottom Layer w20: v1(2715,1010) 2867.85,1010 2904.98,1047.13 2970.87,1047.13 3017.75,1094 3116,1094 3353.44,1331.44 R13.2@3443,1331.44 R1.2@3491,1331.44 3500.73,1341.17 U8.1@3556,1341.17
VCCP_M3_VBATT: C32.2 C41.2 I3.2 R2.2 R16.2 R47.1 U17.1 | length 692.3
  Bottom Layer w20: v1(2930,1010) 2975,1010 3032,1067 3252,1067 3345.44,1160.44 R2.2@3491,1160.44 ; R2.2@3491,1161.44 3500.73,1171.17 U17.1@3556,1171.17
WAKE: R87.1 U4.18 U4.23 | length 688.5
  Top Layer w7: v2(2502,1319) 2519.88,1336.88 2601.12,1336.88 2608,1330 2608,1295.12 2621.12,1282 2649,1282 2673,1306 2691.71,1306 U4.18@2695.67,1309.96 ; R87.1@2668.11,1133.35 2678.35,1133.35 2725,1180 2725,1195 2760.63,1230.63 U4.23@2760.63,1245
  Bottom Layer w7: v2(2502,1319) 2541,1319 v2(2709.07,1150.93)
pads on no net: D2.2 F1.3 F1.4 F1.53 H2.4 P1.4 P3.2 P3.3 S5.1 S5.4 S6.1 S6.4 S7.1 S7.4 U1.A1 U1.A2 U1.A3 U1.A11 U1.B1 U1.B2 U1.B3 U1.B4 U1.B11 U1.C1 U1.C2 U1.C3 U1.C10 U1.C11 U1.D10 U1.D11 U1.E9 U1.E10 U1.E11 U1.F9 U1.F10 U1.F11 U1.G1 U1.G2 U1.G9 U1.G10 U1.G11 U1.H2 U1.H10 U1.H11 U1.J1 U1.J2 U1.J10 U1.J11 U1.K1 U1.K9 U1.K10 U1.K11 U1.L1 U1.L9 U1.L10 U1.L11 U2.A1 U2.A2 U2.A3 U2.A8 U2.A9 U2.A10 U2.B1 U2.B2 U2.B3 U2.B8 U2.B9 U2.B10 U2.C1 U2.C2 U2.C3 U2.C9 U2.C10 U2.G1 U2.G2 U2.G9 U2.H1 U2.H2 U2.H9 U2.H10 U2.J1 U2.J2 U2.J3 U2.J4 U2.J8 U2.J9 U2.J10 U2.K1 U2.K2 U2.K3 U2.K8 U2.K9 U2.K10 U4.21 U4.28 U6.3 U6.4 U6.5 U9.1 U9.2 U9.10 U9.11 U9.12 U9.13 U9.14 U9.15 U9.16 U9.17 U9.18 U9.19 U9.20 U9.21 U9.22 U9.23 U9.24 U9.27 U9.28 U12.3 U12.4 U12.5 U15.3 U15.4 U15.5 X1.1
copper on no net:
  other v4: 1100,1100 1100,5100 5000,5100

## Polygon pours and split planes (outlines as drawn)
no net on Top Overlay "Mid-Layer 1-No Net" (solid): 3686.36,2006.18 3686.36,2096.59 3720.4,2096.59 3720.4,2226.78 3686.75,2226.53 3686.75,2317.53 3824.75,2317.53 3905.75,2201.46 3984.75,2317.53 4120.75,2317.53 4120.75,2226.53 4090.75,2226.53 4090.75,2096.53 4120.75,2096.53 4120.75,2006.53 3954.75,2006.53 3954.75,2096.53 3992.75,2096.53 3992.75,2172.53 3905.75,2056.81 3818.75,2172.53 3818.75,2096.59 3852.79,2096.59 3852.79,2006.18
VCC_B0 on Mid-Layer 2 "Mid-Layer 1-No Net" (solid, pour order 8): 4110,1000 5115,2005 5115,2250 4930,2435 4855,2435 4685,2265 4685,2130 3675,1120 2385,1120 2025,1480 2025,1515 2065,1555 2280,1555 2350,1625 2350,2880 2405,2935 2555,2935 2635,2855 2635,2765 2675,2725 2850,2725 2985,2860 2985,2940 2885,3040 1500,3040 1340,2880 1340,2010 2350,1000
VCC_1P2 on Mid-Layer 2 "Mid-Layer 1-No Net" (solid, pour order 6): 3250,1575 3340,1665 3340,2125 3105,2360 3105,2700 2995,2810 2935,2810 2850,2725 2675,2725 2635,2765 2635,2855 2555,2935 2405,2935 2350,2880 2350,1625 2400,1575
NetC60_2 on Mid-Layer 2 "Mid-Layer 1-No Net" (solid, pour order 14): 2050,3230 2120,3230 2990,4100 2990,4435 2905,4520 2005,4520 1920,4435 1920,3360
M3_VCC_BAT on Mid-Layer 2 "Mid-Layer 1-No Net" (solid, pour order 18): 4294,3070 4547,2817 4547,2774 4575,2746 4728,2746 4834,2852 4835,4345 4815,4365 4735,4365 4715,4385 4715,4570 4510,4775 4440,4775 4415,4750 4415,4705 4380,4670 4350,4670 4295,4615
M3_VCC_0P6 on Mid-Layer 2 "Mid-Layer 1-No Net" (solid, pour order 20): 3950,3010 4252,2707 4409,2708 4446,2746 4446,2918 4295,3069 4295,4615 4350,4670 4380,4670 4415,4705 4415,4870 4395,4890 4050,4890 3950,4790
M3_VCC_1P2 on Mid-Layer 2 "Mid-Layer 1-No Net" (solid, pour order 16): 4499,2583 4450,2633 4450,2820 4480,2850 4510,2850 4547,2817 4547,2774 4575,2746 4728,2746 4834,2852 4835,3220 4835,4345 4815,4365 4735,4365 4715,4385 4715,4570 4510,4775 4440,4775 4415,4800 4415,4905 4480,4970 4985,4970 5115,4840 5115,2785 4913,2583
VCC_PRE on Mid-Layer 2 "Bottom Layer-No Net 1" (solid, pour order 13): 2065,1555 2025,1515 2025,1480 2385,1120 3675,1120 3779,1224 3779,1515 3719,1575 2300,1575 2280,1555
NetC59_2 on Bottom Layer "Mid-Layer 1-No Net" (solid, pour order 12): 1950,3270 1970,3250 2140,3250 2481,3590 2545,3590 2705,3750 2705,4055 2640,4120 2570,4120 2500,4050 2500,3810 2085,3395 1980,3395 1950,3365
NetC58_2 on Bottom Layer "Mid-Layer 1-No Net" (solid, pour order 10): 1805,3305 1860,3250 1930,3250 1950,3270 1950,3365 1983.21,3395 2090,3400 2500,3810 2500,4050 2595,4145 2790,4145 2975,4330 2975,4455 2930,4500 2030,4500 2005,4475 2005,4375 2145,4235 2145,3600 2100,3555 2005,3555 1940,3490 1845,3490 1805,3450
M3_VCC_0P6 on Bottom Layer "Mid-Layer 1-No Net" (solid, pour order 22): 4390,4795 4440,4745 4440,4705 4320,4585 4320,4490 4340,4470 4375,4470 4375,4505 4380,4510 4405,4510 4410,4505 4410,4500 4455,4455 4685,4455 4710,4430 4710,4390 4665,4345 4295,4345 4190,4450 4190,4750 4235,4795
GND on Mid-Layer 1 "Mid-Layer 1-No Net" (solid, pour order 4): 965,975 5125,975 5125,5325 965,5325

## Keep-outs
Keep-Out Layer:
  the board outline again, w10

## Other copper
Top Layer:
  region net VCC_GOC: 2650,1660 2745,1685 2745,1630 2660,1555 2660,1600
  region net VCCP_M3_1P2: 2660,1110 2710,1110 2745,1075 2745,1025 2720,1000 2665,1000 2655,1010 2660,1015
  region net VCCP_M3_VBATT: 2880,1075 2915,1110 2975,1110 2975,1010 2965,1000 2910,1000 2880,1030

## Silkscreen, mask and mechanical layers (free items; w line width, h text height)
Top Overlay:
  rectangle: 3065,3425 3225,3465
  rectangle: 3175,3485 3335,3525
  rectangle: 4001,1050 4161,1090
  rectangle: 3891,990 4051,1030
  lines w8: 4745,2245 4715,2245 4715,2355 4745,2355
  lines w10: 3065,3425 3335,3425 3335,3465 3065,3465 3065,3425 ; 3065,3485 3335,3485 3335,3525 3065,3525 3065,3485 ; 3891,990 3891,1030 4161,1030 4161,990 3891,990 ; 3891,1050 3891,1090 4161,1090 4161,1050 3891,1050
  text "SDA_ALG" at 1360,5185 h40
  text "SCL_ALG" at 1360,5085 h40
  text "M3_1.2V" at 1360,4980 h40
  text "M3_0.6V" at 1360,4880 h40
  text "PINT_VMON" at 3050,4870 h40
  text "SDA_DIG" at 1360,4780 h40
  text "1.2V" at 3270,4780 h40
  text "SCL_DIG" at 1360,4685 h40
  text "0.6V" at 3265,4680 h40
  text "ANA1" at 1360,4585 h40
  text "GND" at 3265,4580 h40
  text "ANA0" at 1360,4485 h40
  text "M3SCL/CLK" at 3280,4401 h40 r270
  text "PINT Testpoints" at 1225,4400 h40 r90
  text "M3SDA/EDI" at 3180,4400 h40 r270
  text "ANA1_IN" at 1360,4385 h40
  text "GND" at 1050,4367 h40
  text "ANA0_IN" at 1360,4285 h40
  text "M3EDO" at 3079,4241 h40 r270
  text "M3EDO" at 3373,3780 h40
  text "M3SDA" at 3373,3680 h40
  text "M3SCL" at 3373,3578 h40
  text "PINT" at 2333,3507 h80
  text "DISCR" at 3365,3485 h40
  text "PINT" at 3365,3425 h40
  text "M3" at 4199,3409 h80
  text "PINT_1.2V" at 1880,3130 h40 r270
  text "PINT_ABUF" at 1980,3130 h40 r270
  text "PINT_VBATT" at 2080,3130 h40 r270
  text "M3IO_0" at 2280,3125 h40 r270
  text "M3IO_1" at 2380,3125 h40 r270
  text "M3IO_2" at 2480,3125 h40 r270
  text "M3IO_3" at 2580,3125 h40 r270
  text "M3IO_4" at 2680,3125 h40 r270
  text "M3IO_5" at 2780,3125 h40 r270
  text "M3IO_6" at 2880,3125 h40 r270
  text "M3IO_7" at 2980,3125 h40 r270
  text "M3IO_8" at 3080,3125 h40 r270
  text "M3IO_9" at 3205,3125 h40 r270
  text "M3IO_10" at 3280,3125 h40 r270
  text "M3IO_11" at 3380,3125 h40 r270
  text "M3IO_12" at 3480,3125 h40 r270
  text "M3IO_13" at 3580,3125 h40 r270
  text "M3IO_14" at 3680,3125 h40 r270
  text "M3IO_15" at 3780,3125 h40 r270
  text "M3IO_16" at 3880,3125 h40 r270
  text "M3IO_17" at 3980,3125 h40 r270
  text "M3IO_18" at 4080,3125 h40 r270
  text "M3IO_19" at 4180,3125 h40 r270
  text "M3IO_20" at 4280,3125 h40 r270
  text "M3IO_21" at 4380,3125 h40 r270
  text "M3IO_22" at 4480,3125 h40 r270
  text "M3IO_23" at 4580,3125 h40 r270
  text "M3SPI_TXD" at 4680,3125 h40 r270
  text "M3SPI_CLK" at 4780,3125 h40 r270
  text "M3SPI_FSS" at 4880,3125 h40 r270
  text "M3SPI_RXD" at 4980,3125 h40 r270
  text "GND" at 1645,3060 h40
  text "GND" at 4758,2680 h40
  text "M3_VSOL" at 4280,2600 h40 r270
  text "M3_0.6V" at 4380,2600 h40 r270
  text "M3_1.2V" at 4480,2600 h40 r270
  text "M3_VBATT" at 4580,2600 h40 r270
  text "FP4" at 4795,2570 h40
  text "SYS_CLK" at 1890,2441 h40
  text "EXT_PWR" at 4325,2073 h40
  text "M3 ICE & Interface" at 3576,1912 h40
  text "USBV" at 2163,1874 h40
  text "Board" at 3816,1847 h40
  text "1.2V" at 2162,1815 h40
  text "3.3V" at 2158,1758 h40
  text "M3_0.6V" at 4300,1531 h40
  text "GND" at 4847,1357 h40
  text "M3_1.2V" at 4300,1353 h40
  text "ICE POWER" at 2018,1184 h40
  text "M3_VBATT" at 4300,1172 h40
  text "GND" at 1760,1080 h40
  text "EXT_PWR -> M3" at 4191,1050 h40
  text "ICE_PWR -> M3" at 4191,990 h40